# Altium PCB miaow-foc-board.pcbdoc (part 3 of 10)
Units mil, origin at the board's own origin, x right, y up, seen from the top; angles counter-clockwise.
Board outline 2755.91 x 3149.61 mil, 6 copper layers (SIG1, GND2, SIG3, PWR4, GND5, SIG6), stack 60.566 mil thick; 437 components, 392 nets, 2120 pads, 1697 vias.
Unrouted connection lines stored in the file: 1090.
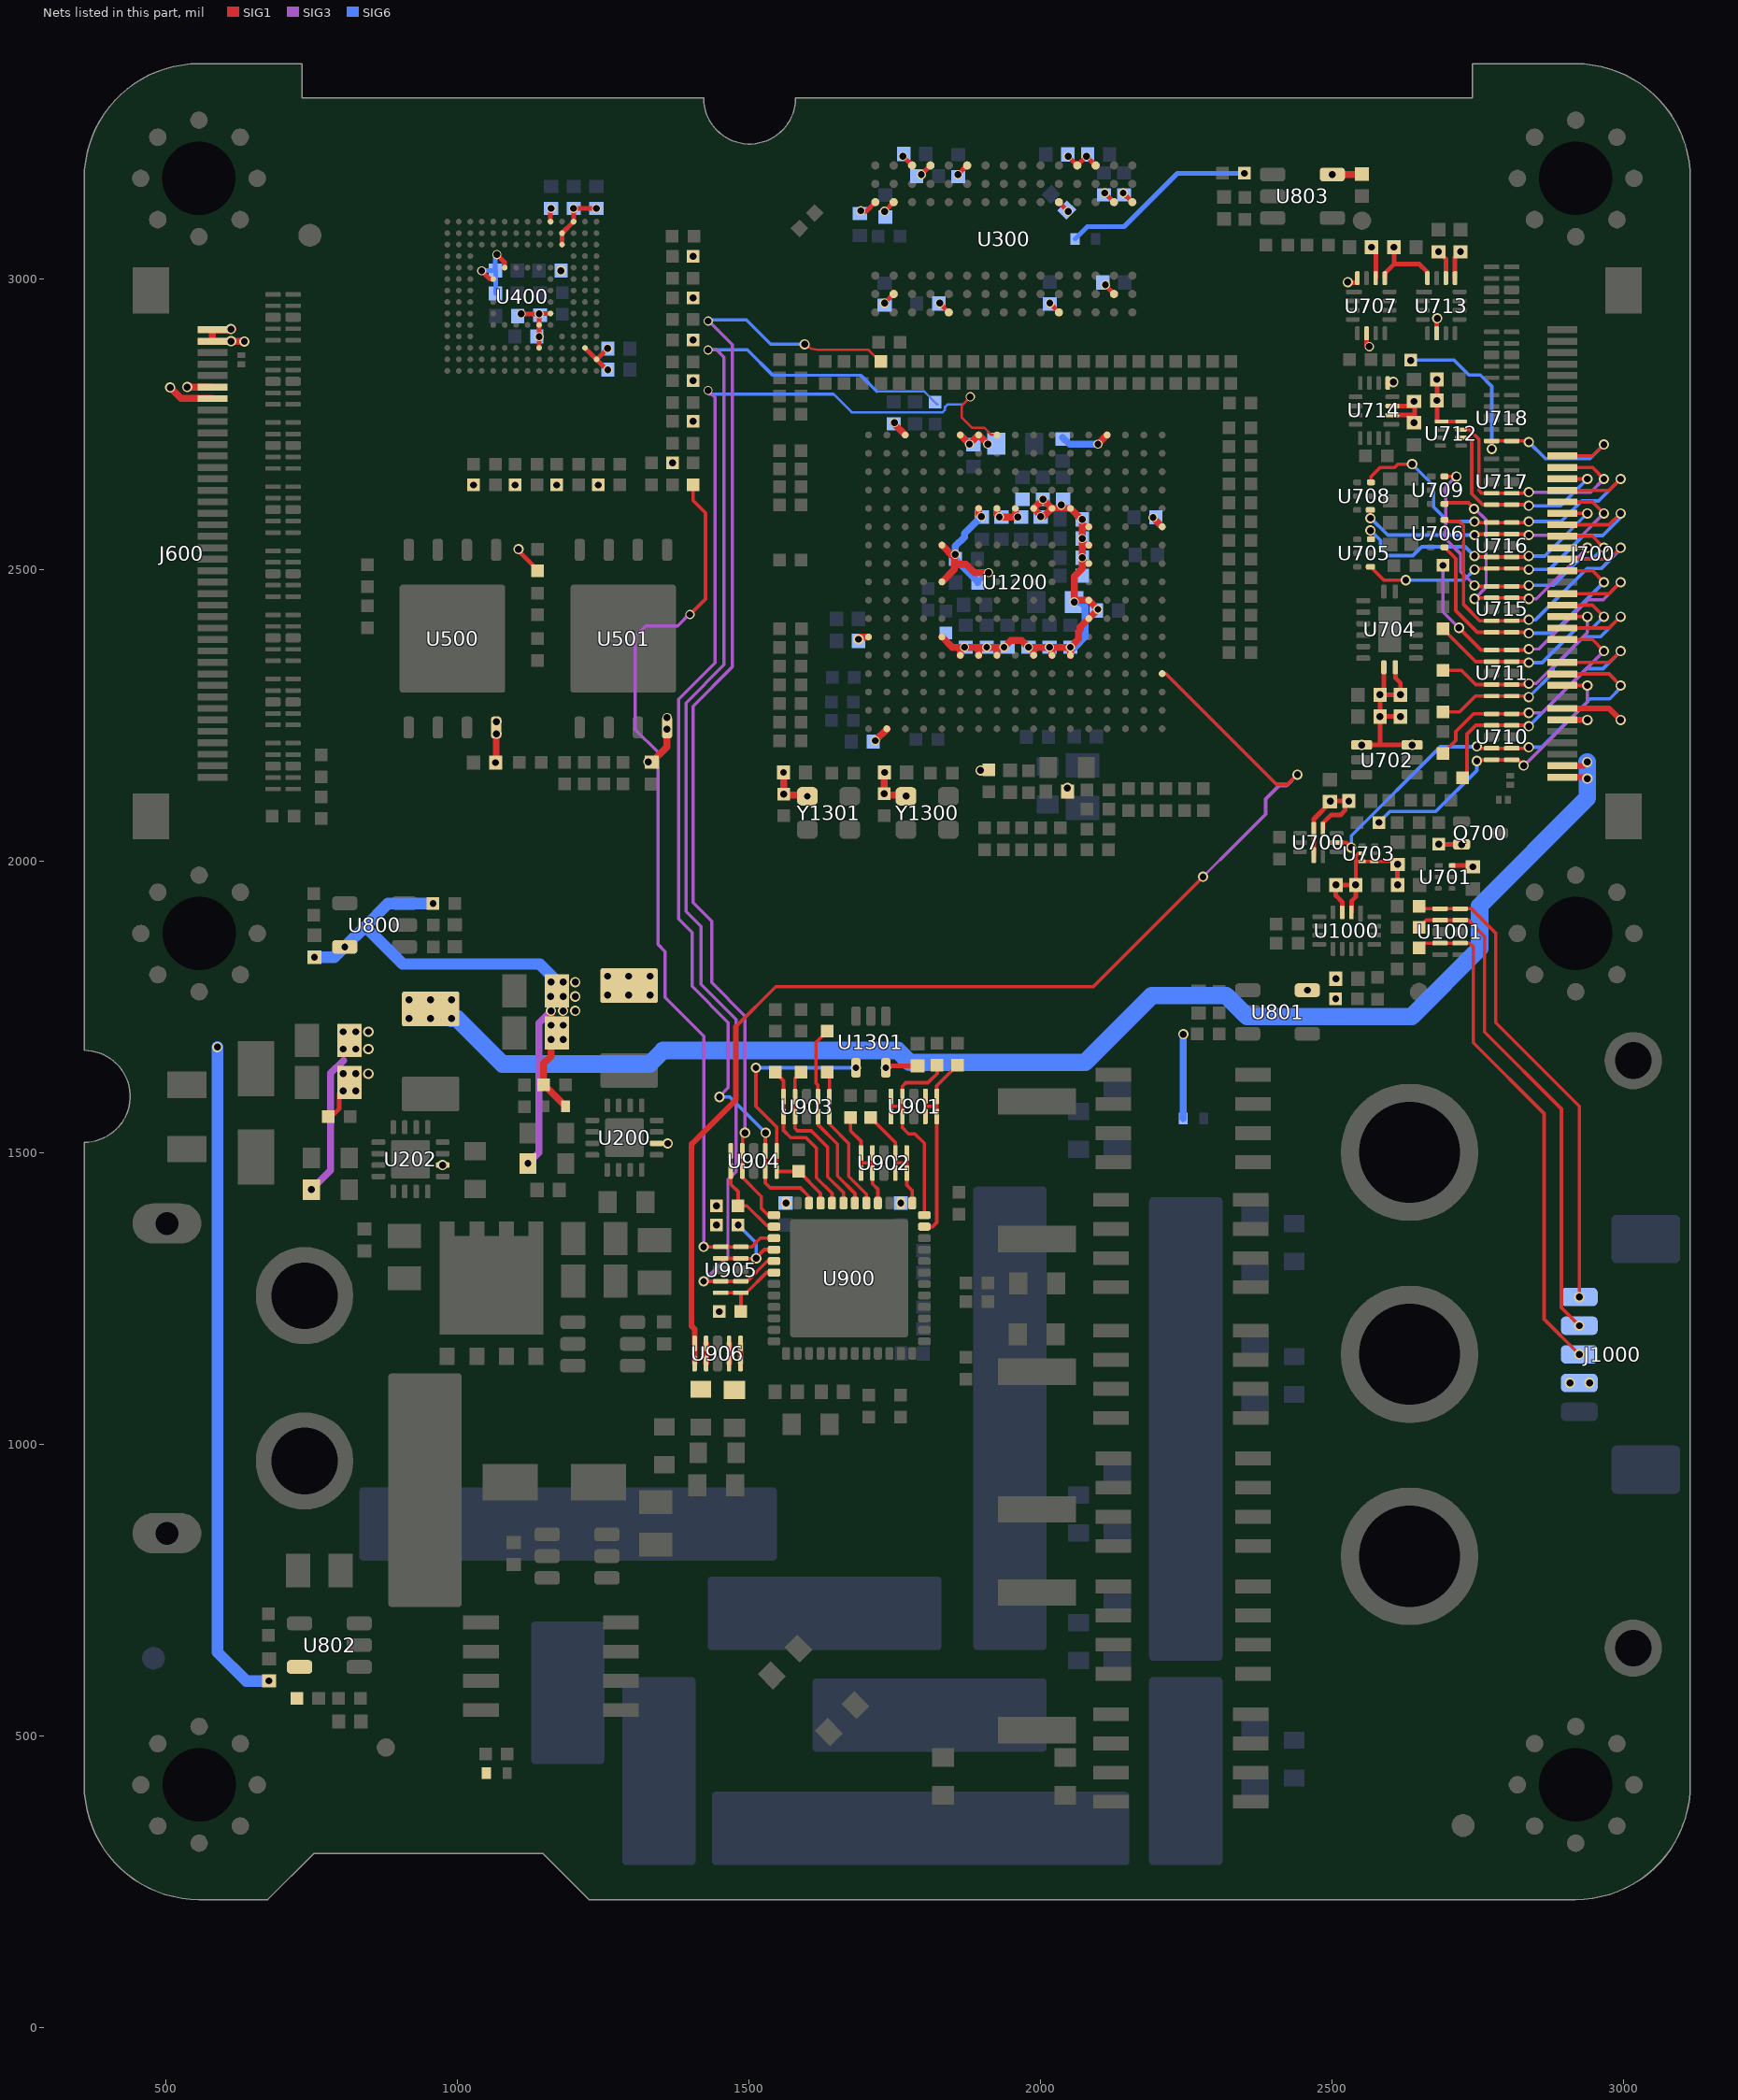
[diagram p6: the nets of this part, all layers, seen from the top]

## Via types
v1: diameter 17.72, hole 11.81, SIG1 to SIG6, tented both sides, 1223 vias
v2: diameter 15.75, hole 11.81, SIG1 to SIG6, tented both sides, 453 vias
v3: diameter 17.72, hole 11.81, SIG1 to SIG6, tented top, 21 vias

## Nets (pads, with @x,y where several pads share a name; then routed paths per layer and width w, separated by ;. In a path a pad name is that pad's centre, name@x,y a point inside that pad or via, vN(x,y) a via of type N, cw(c..) or ccw(c..) an arc to the next point about the centre after c; other vN are vias at no path point) (continued)
_29: (continued)
  SIG6 w6: v2@2635.52,2860.23 2709.71,2860.23 2735.31,2834.63 2755,2834.63 2774.7,2814.93 v1(2774.7,2707.84) ; v1(2838.16,2719.76) 2866.74,2691.18 2942.86,2691.18 v1(2967.06,2715.38)
  other v2: 2635.52,2859.8